# EAGLE board ss_fab_arduino (EAGLE 5.06)
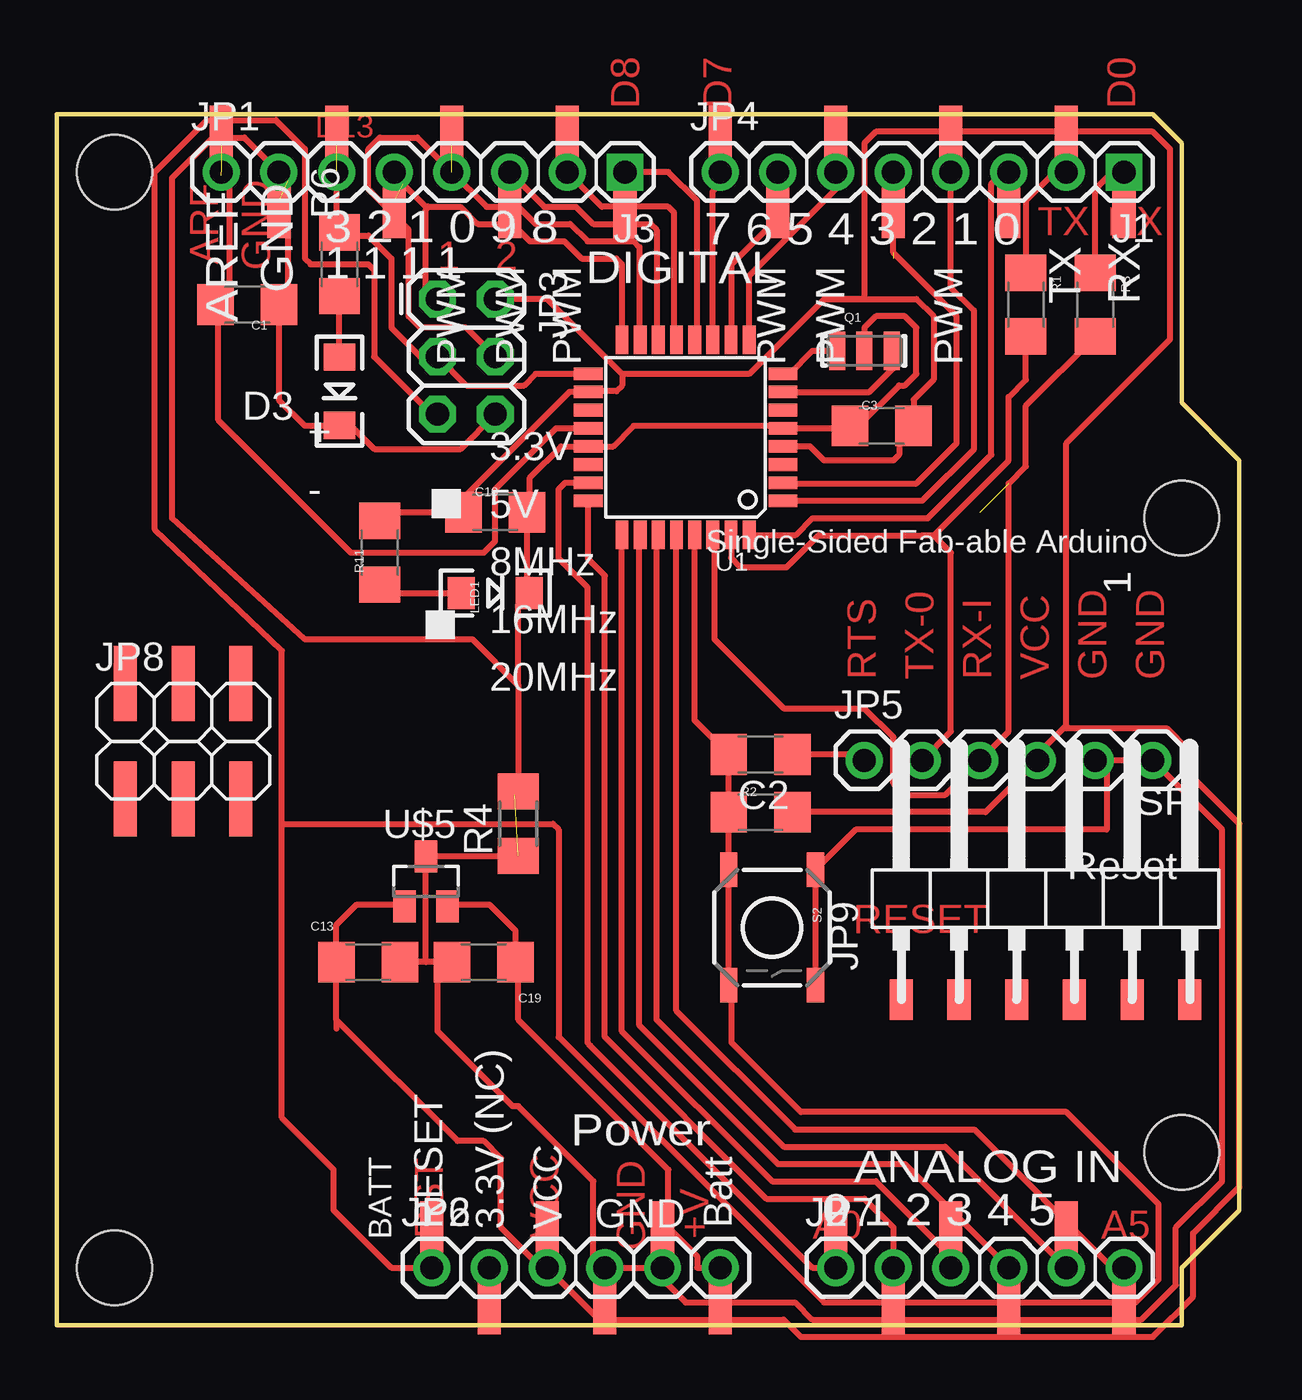
[diagram p0: board, top side]

Size 52.07 x 53.34 mm. Coordinates in mm from the lower left corner, seen from the top.
Outline: 0,53.34 0,0 49.53,0 49.53,2.54 52.07,5.08 52.07,38.1 49.53,40.64 49.53,52.07 48.26,53.34 0,53.34
Copper layers (1*16): Top 0.035mm / dielectric 1.5mm / Bottom 0.035mm
Design rules "SparkFun": minimum track width 8mil, minimum drill 20mil, track to track 8mil, track to pad 8mil, pad to pad 8mil, via to via 8mil, smd to smd 8mil, copper to edge 10mil, drill to drill 8mil, minimum pad ring 12mil, minimum via ring 10mil, stop-mask expansion 4mil, vias tented up to drill 20mil, thermal gap 10mil
Net classes: 0 default: width 0.203 mm; 1 vcc: width 0.254 mm

## Footprints (pad centres in the part's own frame; a part is rotated, then mirrored left to right if it is on the bottom)
C1206 = smd 1.6 x 1.8: 1 -1.4,0; 2 1.4,0
LED-1206 = smd 1.2 x 1.4: A -1.5,0; C 1.5,0
1X08 = drill 1.016 square: 1 0,0 | drill 1.016 round: 2 2.54,0; 3 5.08,0; 4 7.62,0; 5 10.16,0; 6 12.7,0; 7 15.24,0; 8 17.78,0
1X06 = drill 1.016 round: 1 0,0; 2 2.54,0; 3 5.08,0; 4 7.62,0; 5 10.16,0; 6 12.7,0
1X08SMD = smd 1.016 x 3.302: 1 -1.27,1.27; 2 1.27,-1.27; 3 3.81,1.27; 4 6.35,-1.27; 5 8.89,1.27; 6 11.43,-1.27; 7 13.97,1.27; 8 16.51,-1.27
2X3 = drill 1.016 octagon: 1 0,0; 2 0,2.54; 3 2.54,0; 4 2.54,2.54; 5 5.08,0; 6 5.08,2.54
1X06SMD = smd 1.016 x 3.302: 1 -1.27,1.27; 2 1.27,-1.27; 3 3.81,1.27; 4 6.35,-1.27; 5 8.89,1.27; 6 11.43,-1.27
2X03SMD = smd 1.016 x 3.302: 1 -1.27,-3.81; 2 -1.27,1.27; 3 1.27,-3.81; 4 1.27,1.27; 5 3.81,-3.81; 6 3.81,1.27
1X06SMD/90 = smd 1.016 x 1.778: 1 -1.27,-5.08; 2 1.27,-5.08; 3 3.81,-5.08; 4 6.35,-5.08; 5 8.89,-5.08; 6 11.43,-5.08
RESONATOR-SMD = smd 0.7 x 1.7: 1 -1.2,0; 2 0,0; 3 1.2,0
1206 = smd 1.6 x 1.8: 1 -1.4,0; 2 1.4,0
R1206 = smd 1.6 x 1.803: 1 -1.422,0; 2 1.422,0
TACTILE_SWITCH_SMD = smd 1.524 x 0.762: 1 -2.54,1.905; 2 2.54,1.905; 3 -2.54,-1.905; 4 2.54,-1.905
TQFP32-08 = smd 1.27 x 0.559: 1 -4.293,2.8; 2 -4.293,2; 3 -4.293,1.2; 4 -4.293,0.4; 5 -4.293,-0.4; 6 -4.293,-1.2; 7 -4.293,-2; 8 -4.293,-2.8; 17 4.293,-2.8; 18 4.293,-2; 19 4.293,-1.2; 20 4.293,-0.4; 21 4.293,0.4; 22 4.293,1.2; 23 4.293,2; 24 4.293,2.8 | smd 0.559 x 1.27: 9 -2.8,-4.293; 10 -2,-4.293; 11 -1.2,-4.293; 12 -0.4,-4.293; 13 0.4,-4.293; 14 1.2,-4.293; 15 2,-4.293; 16 2.8,-4.293; 25 2.8,4.293; 26 2,4.293; 27 1.2,4.293; 28 0.4,4.293; 29 -0.4,4.293; 30 -1.2,4.293; 31 -2,4.293; 32 -2.8,4.293
STAND-OFF = hole 3.302: 0,0
SOT23 = smd 1 x 1.4: 1 -0.95,-1.1; 2 0.95,-1.1; 3 0,1.1

## Placement (x,y rotation side)
C1  0.1uF  [C1206]  8.38,44.96 180 top
C2  0.1uF  [C1206]  30.99,25.15 180 top
C3  0.1uF  [C1206]  36.32,39.62 0 top
C10  0.1uF  [C1206]  19.3,35.81 0 top
C13  10uF  [C1206]  13.72,16 0 top
C19  10uF  [C1206]  18.8,16 180 top
D3  Green  [LED-1206]  12.45,41.15 270 top
J1  [1X08]  46.99,50.8 180 top
J2  [1X06]  34.29,2.54 0 top
J3  [1X08]  25.02,50.8 180 top
JP1  [1X08SMD]  8.51,50.8 0 top
JP2  POWER  [1X06]  16.51,2.54 0 top
JP3  ISP  [2X3]  16.76,45.21 270 top
JP4  [1X08SMD]  30.48,50.8 0 top
JP5  COM  [1X06]  35.56,24.89 0 top
JP6  [1X06SMD]  17.78,2.54 0 top
JP7  [1X06SMD]  35.56,2.54 0 top
JP8  [2X03SMD]  4.29,27 0 top
JP9  [1X06SMD/90]  38.46,19.43 0 top
LED1  Red  [LED-1206]  19.3,32.26 0 top
Q1  #MHz  [RESONATOR-SMD]  35.56,42.93 0 top
R1  1K  [1206]  42.67,44.96 270 top
R2  10K  [1206]  30.99,22.61 0 top
R3  1K  [1206]  45.72,44.96 270 top
R4  0  [R1206]  20.32,22.1 90 top
R6  330  [1206]  12.45,46.74 270 top
R11  4.7K  [1206]  14.22,34.04 90 top
S2  Reset  [TACTILE_SWITCH_SMD]  31.5,17.53 270 top
U1  ATMEGA168#  [TQFP32-08]  27.69,39.12 180 top
U$1  STAND-OFF  [STAND-OFF]  2.54,50.8 0 top
U$3  STAND-OFF  [STAND-OFF]  2.54,2.54 0 top
U$5  LM3480  [SOT23]  16.26,19.56 0 top
U$9  STAND-OFF  [STAND-OFF]  49.53,35.56 0 top
U$10  STAND-OFF  [STAND-OFF]  49.53,7.62 0 top

## Library data of the parts
C1-C3 C10 C13 C19 R4 = resistor
D3 J1-J3 JP2 JP3 JP5 LED1 Q1 R1-R3 R6 R11 S2 U$1 U$3 U$9 U$10 = SparkFun
JP1 JP4 JP6-JP9 = pinhead-2
U1 = atmel
U$5 = jmanton

## Nets
3.3V: JP2.2
+5V: C3.2 C10.1 C13.1 JP2.3 JP3.2 JP5.4 R2.2 R11.2 U1.4 U1.18 U$5.1
A0: J2.1 U1.23
A1: J2.2 U1.24
A2: J2.3 U1.25
A3: J2.4 U1.26
A4: J2.5 U1.27
A5: J2.6 U1.28
AREF: C1.2 J3.8 JP1.1 U1.20
D2: J1.3 U1.32
D3: J1.4 U1.1
D4: J1.5 U1.2
D5: J1.6 U1.9
D6: J1.7 U1.10
D7: J1.8 U1.11
D8: J3.1 U1.12
D9: J3.2 U1.13
D10: J3.3 U1.14
DTR: C2.1 JP5.1
GND [vcc]: C1.1 C3.1 C10.2 C13.2 C19.2 D3.C J3.7 JP1.2 JP2.4 JP2.5 JP3.6 JP5.5 JP5.6 LED1.C Q1.2 R4.1 R4.2 S2.1 S2.2 U1.5 U1.21 U$5.3
LIPO: C19.1 JP2.6 U$5.2
MISO: J3.5 JP1.4 JP3.1 U1.16
MOSI: J3.4 JP1.5 JP3.4 U1.15
N$3: Q1.1 U1.8
N$4: Q1.3 U1.7
N$7: D3.A R6.2
N$38: LED1.A R11.1
RESET: C2.2 JP2.1 JP3.5 R2.1 S2.3 S2.4 U1.29
RX-I: JP5.3 R3.2 U1.30
RX-IP: J1.2 R1.1
SCK: J3.6 JP1.3 JP3.3 R6.1 U1.17
TX-O: JP5.2 R1.2 U1.31
TX-OP: J1.1 R3.1

## Tracks (layer width: path | path; a pad name or v marks a point on that pad's centre or on a via)
+5V
  Top 0.254: JP2.3 21.46,2.67 | 31.87,38.61 U1.4 33.17,38.72 33.78,38.1 36.83,38.1 37.08,38.35 37.08,38.99 C3.2 37.72,40.77 38.61,41.66 38.61,44.45 37.85,45.21 33.78,45.21 | JP2.3 23.88,0.25 32,0.25 32.77,-0.51 48.26,-0.51 50.04,1.27 50.04,4.06 52.07,6.1 52.07,22.1 49.78,24.38 49.78,25.4 48.9,26.29 44.32,26.29 | 12.32,13.46 12.32,13.08 | 12.32,13.46 C13.1 12.32,17.65 13.21,18.54 15.22,18.54 U$5.1 | R11.2 14.6,35.81 C10.1 18.03,35.94 18.03,36.58 22.57,41.12 U1.18 23.43,41.15 24.64,41.15 24.89,41.4 24.89,41.91 | 33.78,45.21 30.48,41.91 24.89,41.91 | JP3.2 21.59,45.21 24.89,41.91 | 33.78,45.21 35.56,45.21 35.56,52.07 36.07,52.58 48.26,52.58 49.02,51.82 49.02,43.43 44.45,38.86 44.45,26.42 44.32,26.29 | R2.2 40.89,22.61 JP5.4 43.18,25.15 44.32,26.29 | JP2.3 21.34,2.54 19.56,4.32 19.56,7.37 18.8,8.13 17.65,8.13 12.32,13.46
A0
  Top 0.254: U1.23 22.38,37.12 22.1,36.83 22.1,33.78 23.37,32.51 23.37,12.45 23.5,12.32 33.27,2.54 J2.1
A1
  Top 0.254: U1.24 23.39,33.76 24.13,33.02 24.13,12.7 31.24,5.59 35.56,5.59 36.83,4.32 J2.2
A2
  Top 0.254: U1.25 24.89,12.96 31.5,6.35 36.07,6.35 39.37,3.05 J2.3
A3
  Top 0.254: U1.26 25.65,34.79 25.65,13.21 31.75,7.11 37.34,7.11 J2.4
A4
  Top 0.254: U1.27 26.42,34.75 26.42,13.46 32,7.87 39.12,7.87 J2.5
A5
  Top 0.254: U1.28 27.29,13.86 32.51,8.64 40.39,8.64 46.48,2.54 J2.6
AREF  (2 unrouted)
  Top 0.254: U1.20 21.99,39.52 19.3,36.83 19.3,34.54 18.8,34.04 12.95,34.04 7.11,39.88 7.11,44.83 C1.2 6.98,45.59 7.11,45.72 7.37,45.47 7.62,45.47 7.62,50.29 7.24,50.67
D2
  Top 0.254: J1.3 41.66,50.8 41.15,50.29 41.15,38.35 38.35,35.56 33.27,35.56 32.54,34.82 U1.32
D3
  Top 0.254: J1.4 39.37,45.72 40.39,44.7 40.39,38.61 38.1,36.32 U1.1
D4  (1 unrouted)
  Top 0.254: U1.2 32.01,37.08 37.85,37.08 39.62,38.86 39.62,44.45 36.83,47.24 J1.5
D5
  Top 0.254: U1.9 30.48,46.23 34.29,50.04 J1.6
D6
  Top 0.254: U1.10 29.72,43.44 29.72,46.74 31.75,48.77 J1.7
D7
  Top 0.254: 28.96,43.48 U1.11 28.89,49.97 29.21,50.29 J1.8
D8
  Top 0.254: U1.12 28.19,43.52 28.19,49.53 26.92,50.8 J3.1
D9
  Top 0.254: U1.13 27.18,43.52 27.18,49.02 26.92,49.28 24,49.28 J3.2
D10
  Top 0.254: U1.14 26.42,43.48 26.42,48.26 26.16,48.51 23.62,48.51 22.86,49.28 21.46,49.28 J3.3 19.94,50.67
DTR
  Top 0.254: JP5.1 35.31,25.15 C2.1
GND  (2 unrouted)
  Top 0.254: JP2.4 JP2.5 | JP2.4 JP2.5 | S2.2 S2.1 35.18,21.84 46.23,21.84 46.23,24.38 JP5.5 JP5.6 51.31,21.84 51.31,6.35 49.28,4.32 49.28,1.78 47.75,0.25 33.27,0.25 32.51,1.02 27.69,1.02 26.67,2.03 JP2.5 | C19.2 17.53,15.87 | 16.26,16 C13.2 | C19.2 16.26,16 | 20.17,23.37 R4.2 20.32,28.19 | R4.1 16.27,20.68 U$5.3 16.26,16 | C19.2 16.76,15.37 16.76,12.95 20.07,9.65 20.32,9.65 23.62,6.35 23.62,3.05 JP2.4 | 20.32,28.19 18.29,30.23 10.92,30.23 5.08,35.56 5.08,50.55 6.86,52.32 8.26,52.32 J3.7 10.16,50.42 10.16,45.21 9.91,44.96 C1.1 9.78,40.76 10.92,39.62 12.42,39.62 D3.C 12.93,39.65 13.97,38.61 17.78,38.61 JP3.6 | 20.32,28.19 20.32,31.77 LED1.C 20.7,32.36 C10.2 20.83,35.94 20.83,37.34 22.21,38.72 U1.21 24.49,38.72 25.4,39.62 31.87,39.62 U1.5 34.81,39.52 C3.1 35.31,39.62 37.08,41.4 37.34,41.4 37.85,41.91 37.85,43.94 37.34,44.45 36.07,44.45 35.56,43.94 Q1.2 | JP2.4 JP2.5
LIPO
  Top 0.254: C19.1 20.07,15.87 | C19.1 20.2,17.4 19.05,18.54 17.29,18.54 U$5.2 | JP2.6 28.19,2.54 28.19,3.05 26.92,4.32 26.92,6.86 20.32,13.46 20.32,15.88 C19.1
MISO  (1 unrouted)
  Top 0.254: 14.99,50.8 J3.5 15.24,50.42 15.24,50.29 16.26,49.28 16.38,49.28 | U1.16 24.89,46.74 24.64,46.99 23.11,46.99 22.35,47.75 20.83,47.75 20.07,48.51 18.54,48.51 17.78,49.28 16.38,49.28 | JP3.1 16.26,45.72 16.26,49.15 16.38,49.28
MOSI  (1 unrouted)
  Top 0.254: U1.15 25.65,43.44 25.65,47.5 25.4,47.75 23.37,47.75 22.61,48.51 21.08,48.51 20.32,49.28 18.92,49.28 J3.4 | J3.4 17.4,50.67 | J3.4 15.88,52.32 14.22,52.32 13.72,51.82 13.72,50.04 15.49,48.26 15.49,44.45 16,43.94 18.03,43.94 JP3.4
N$3
  Top 0.254: U1.8 32.26,41.92 33.27,42.93 Q1.1 34.47,42.93
N$4
  Top 0.254: U1.7 35.78,41.12 36.83,42.16 36.83,42.86 Q1.3
N$7
  Top 0.254: D3.A R6.2
N$38
  Top 0.254: R11.1 14.6,32.26 LED1.A
RESET
  Top 0.254: S2.3 S2.4 29.72,14.86 29.72,12.45 32.77,9.4 44.45,9.4 48.51,5.33 48.51,2.03 47.5,1.02 33.78,1.02 22.1,12.7 22.1,21.84 21.84,22.1 9.91,22.1 | S2.3 | 9.91,22.1 9.91,29.72 4.32,35.05 4.32,50.8 6.6,53.09 9.65,53.09 10.92,51.82 10.92,46.99 11.18,46.74 13.72,46.74 13.97,46.48 13.97,42.67 16.51,40.13 JP3.5 | 9.91,22.1 9.91,9.14 12.19,6.86 12.19,5.08 14.73,2.54 JP2.1 | U1.29 28.09,26.65 C2.2 R2.1 S2.3
RX-I  (1 unrouted)
  Top 0.254: R3.2 42.67,40.51 42.67,37.85 41.91,37.08 41.91,26.16 JP5.3 39.12,23.37 37.34,23.37 36.83,23.88 36.83,25.91 35.56,27.18 32,27.18 28.96,30.23 28.96,34.75 U1.30
RX-IP
  Top 0.254: J1.2 43.94,50.8 42.67,49.53 R1.1
SCK  (1 unrouted)
  Top 0.254: J3.6 12.32,48.13 12.45,48.01 R6.1 12.57,48.26 12.82,48.01 13.72,48.01 14.73,46.99 14.73,43.94 16,42.67 JP3.3 18.03,41.4 20.57,41.4 21.09,41.92 U1.17
TX-O
  Top 0.254: U1.31 29.69,33.81 30.1,33.4 32.13,33.4 33.53,34.8 38.1,34.8 38.61,34.8 | R1.2 42.67,41.66 41.91,40.89 41.91,38.1 38.61,34.8 | JP5.2 39.37,26.16 39.37,34.04 38.61,34.8
TX-OP
  Top 0.254: J1.1 46.48,50.8 45.72,50.04 R3.1

## Text on the board
Top: D8 | D7 | D0 | D13 | TX | RX | ARF | GND | 1 | 2 | RTS | TX-0 | RX-I | VCC | GND | GND | RESET | RST | VCC | +V | A0 | A5 | GND
tPlace: Released under the Creative Commons Attribution Share-Alike 3.0 License | http://creativecommons.org/licenses/by-sa/3.0 | 3 2 1 0 9 8 | 7 6 5 4 3 2 1 0 | 1 1 1 1 | DIGITAL | GND | TX | RX | AREF | RTS | PWM | PWM | PWM | PWM | PWM | PWM | TX-0 | + | RX-I | 3.3V | 5/3.3V | - | 5V | Single-Sided Fab-able Arduino | GND | 8MHz | 1 | GND | 16MHz | 20MHz | ISP | Reset | Power | ANALOG IN | BATT | RESET | 3.3V (NC) | VCC | GND | Batt | 0 1 2 3 4 5
tValues: Arduino Pro | DNP | DNP | Production: DNP | DNP | JST-Right Angle | Production: DNP | Proto: 2x3 male header up | Right-angle 6-pin | DNP | DNP | DNP | DNP | DNP | DNP | Right-angle slide switch | Depending on the flavor, populate: | 8MHz Resonator/3.3V Regulator/ATmega168V | 16MHz Resonator/5V Regulator/ATmega168 | 20MHz Resonator/5V Regulator/ATmega168 | Mark the white boxes accordingly